# Altium PCB Node_V3.PcbDoc
Units mm, origin at the board's own origin, x right, y up, seen from the top; angles counter-clockwise.
Board outline 72.52 x 53.47 mm, 2 copper layers (Top Layer, Bottom Layer); 71 components, 51 nets, 277 pads, 61 vias.
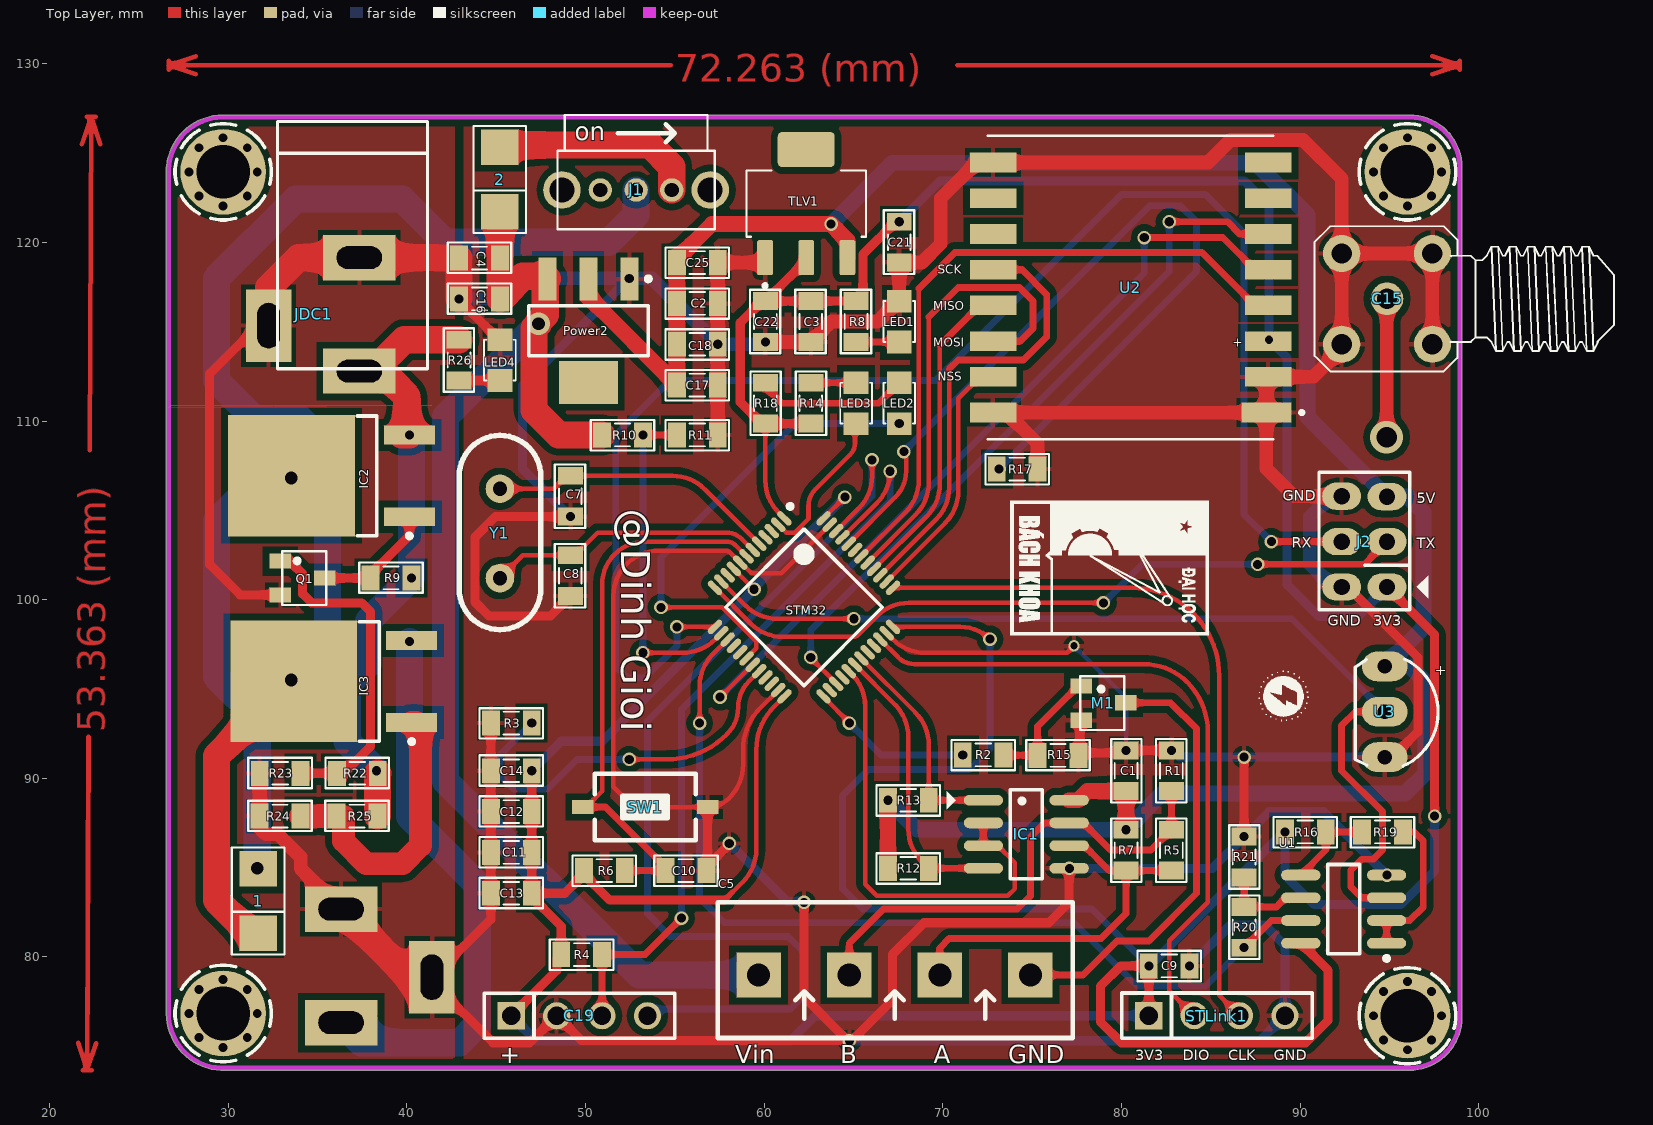
[diagram p0: Top Layer view]
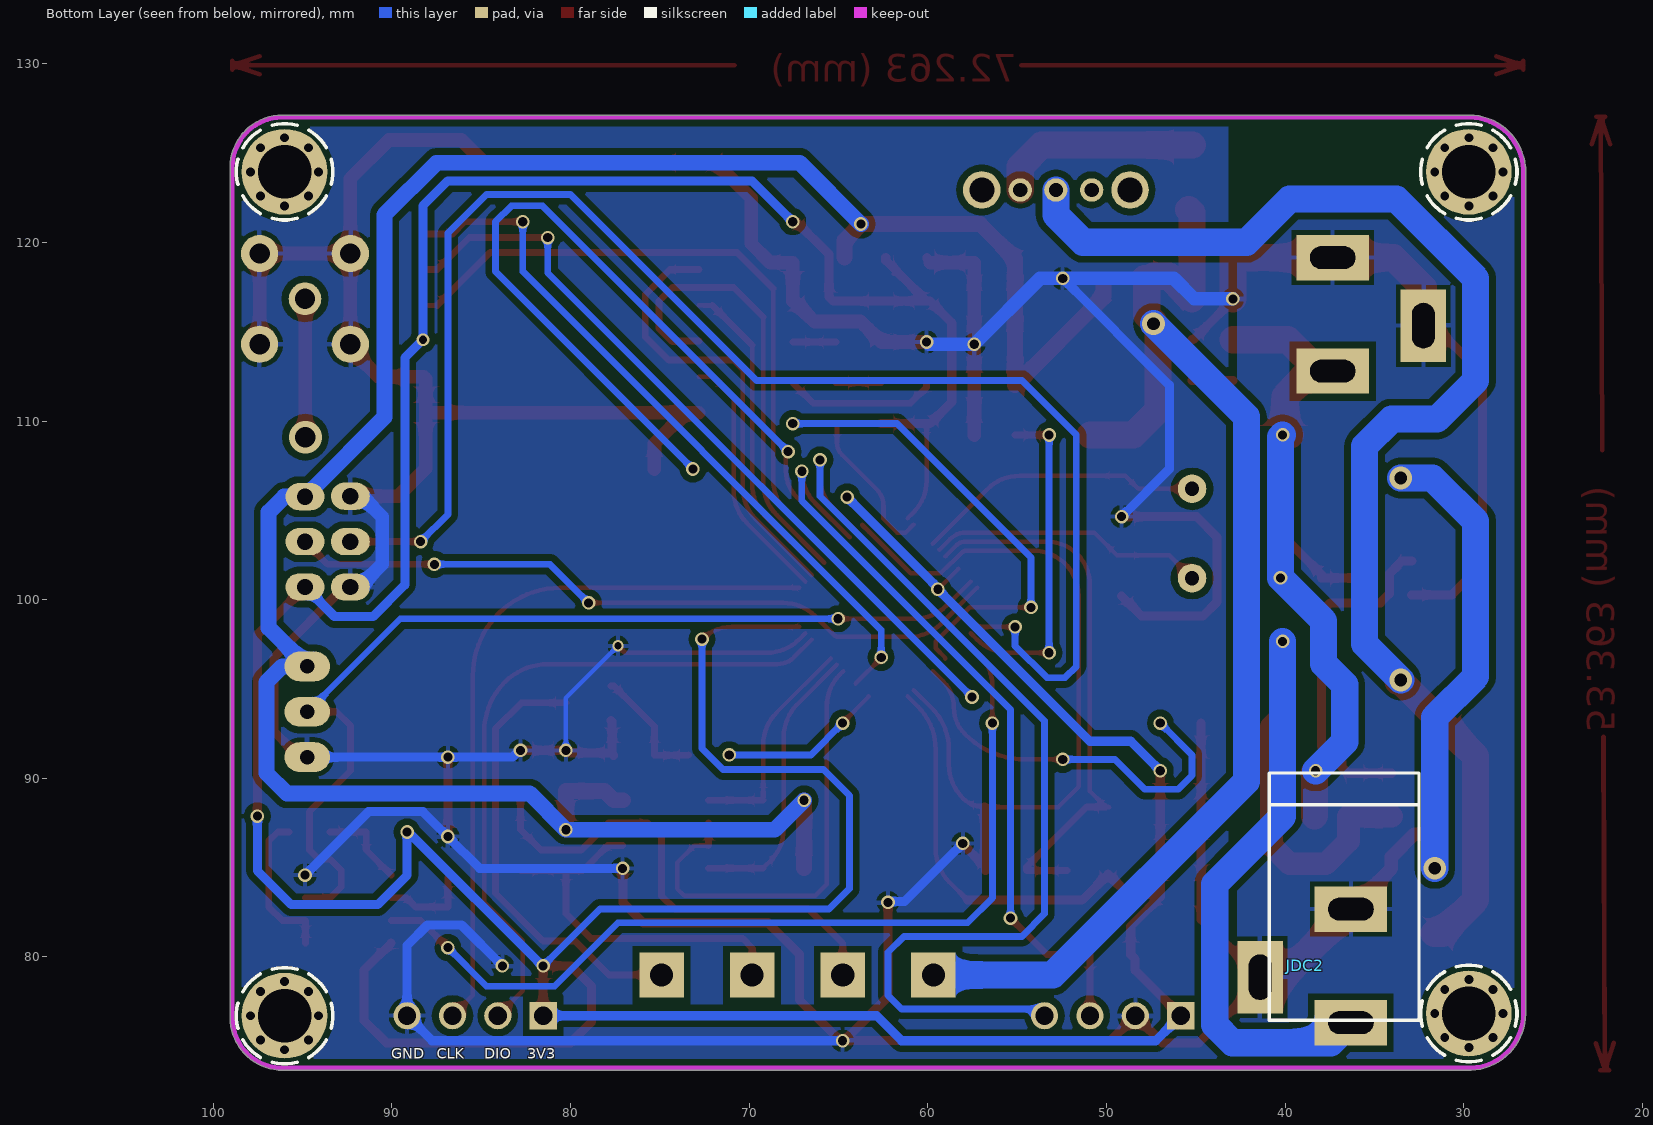
[diagram p1: Bottom Layer view, seen from below]

## Layer stack, top to bottom
Top Solder: solder mask 0.0102, Solder Resist, Dk 3.5
Top Layer: signal copper 0.0356
Dielectric 1: dielectric 0.32, FR-4, Dk 4.8
Bottom Layer: signal copper 0.0356
Bottom Solder: solder mask 0.0102, Solder Resist, Dk 3.5

## Board outline
29.601,73.661 cw(c29.705,76.822) 26.543,76.822 26.543,124.206 cw(c26.67,124.206) 26.557,124.265 cw(c29.705,123.965) 29.693,127.127 cw(c29.694,127) 29.699,127.127 cw(c29.705,127) 29.705,127.127 96.139,127.127 cw(c96.139,124.206) 99.06,124.207 cw(c98.933,124.206) 99.06,124.206 99.06,76.603 cw(c98.933,76.602) 99.06,76.602 cw(c96.118,76.602) 96.118,73.66 cw(c96.118,73.787) 96.118,73.66 29.738,73.661 cw(c29.718,73.787) 29.721,73.66 cw(c29.718,73.787) 29.697,73.661 29.605,73.661 cw(c29.605,73.789)

## Design rules (kind name [scope] priority, off if disabled: settings)
Clearance [All] p1: gap=0.381 ignorepadtopadclearanceinfootprint=TRUE except(0: Arc-Hole Track-Hole SMDPad-Hole THPad-Hole Via-Hole Fill-Hole Poly-Hole Region-Hole Text-Hole; 0.178: Arc-Arc Arc-Track Arc-SMDPad Track-Track Track-SMDPad SMDPad-SMDPad; 0.254: Arc-THPad Arc-Via Arc-Text Track-THPad Track-Via Track-Text SMDPad-THPad SMDPad-Via SMDPad-Text THPad-THPad THPad-Via THPad-Text Via-Via Via-Text Fill-Text Poly-Text Region-Text Text-Text)
PolygonConnect [All] p1: connectstyle=Relief reliefconductorwidth=0.254 reliefentries=4 polygonreliefangle="90 Angle" airgapwidth=0.254
RoutingVias [All] p1: holewidth=0.508 width=0.762 viastyle="Through Hole" minholewidth=0.508 minwidth=0.508 maxholewidth=0.711 maxwidth=1.27
SolderMaskExpansion [All] p1: expansion=0.102
Width [All] p1: maxlimit=1.524 minlimit=0.254 preferedwidth=0.508
30 further rules are at their usual default settings.

## Classes and differential pairs
component class STM32_V3: C1 C5 C7 C8 C9 C10 C11 C12 C13 C14 C15 C19 C21 IC1 J2 LED2 LED3 M1 R1 R2 R3 R4 R5 R6 R7 R10 R11 R12 R13 R14 R15 R16 R17 R18 R19 R20 R21 STLink1 STM32 STM32_V3 SW1 U1 U2 U3 Y1
component class Power_V3: 1 2 C2 C3 C4 C16 C17 C18 C22 C25 IC2 IC3 J1 JDC1 JDC2 LED1 LED4 Power2 Q1 R8 R9 R22 R23 R24 R25 R26 TLV1

## Components (designator, comment, footprint, x,y, rotation, side; value= is the part's Value field where it differs from the comment)
1 "S4" DIO-214AC(SMA) 31.623,83.058 r90 top
2 "S4" DIO-214AC(SMA) 45.148,123.444 r90 top
C1 "100nF" CAP_0805 80.264,90.424 r90 top value=33p
C2 "100nF" CAP_0805 56.261,116.586 r0 top value=33p
C3 "100nF" CAP_0805 62.611,115.57 r270 top value=33p
C4 "10uF" CAP_0805 44.069,119.126 r180 top value=33p
C5 "JP4" KF4-5.08 59.69,78.994 r0 top
C7 "22pF" CAP_0805 49.149,105.791 r270 top value=33p
C8 "22pF" CAP_0805 49.149,101.341 r270 top value=33p
C9 "100nF" CAP_0805 82.677,79.502 r0 top value=33p
C10 "100nF" CAP_0805 55.626,84.836 r0 top value=33p
C11 "100nF" CAP_0805 45.847,85.852 r180 top value=33p
C12 "100nF" CAP_0805 45.847,88.138 r180 top value=33p
C13 "100nF" CAP_0805 45.847,83.566 r180 top value=33p
C14 "100nF" CAP_0805 45.847,90.424 r180 top value=33p
C15 "210111003" SMA-RA 94.869,116.84 r90 top
C16 "100nF" CAP_0805 44.069,116.84 r180 top value=33p
C17 "10uF" CAP_0805 56.261,112.014 r0 top value=33p
C18 "100nF" CAP_0805 56.261,114.3 r0 top value=33p
C19 "JP4" JP4-C1T 45.847,76.708 r0 top
C21 "10uF" CAP_0805 67.564,120.015 r270 top value=33p
C22 "100nF" CAP_0805 60.071,115.57 r270 top value=33p
C25 "100nF" CAP_0805 56.261,118.872 r0 top value=33p
IC1 "MAX485" SO-8 74.676,86.868 r0 top
IC2 "AOD4185" TO-252 35.941,106.934 r180 top
IC3 "AOD4185" TO-252 36.068,95.421 r180 top
J1 "SK12D07VG4" SK12D07VG4 52.832,122.936 r180 top
J2 "Connector 3x2" JP3x2 93.599,103.251 r90 top
JDC1 "Adapter" DC-IN 34.798,115.974 r270 top value="Jac DC"
JDC2 "BATTERY" DC-IN 38.862,79.502 r270 bottom value="Jac DC"
LED1 "LED" LED-0805-Blue 67.564,114.427 r90 top value="LED 3 ly Single Colour"
LED2 "LED" LED-0805-Blue 67.564,112.141 r270 top value="LED 3 ly Single Colour"
LED3 "LED" LED-0805-Blue 65.151,112.141 r270 top value="LED 3 ly Single Colour"
LED4 "LED" LED-0805-Blue 45.211,112.268 r90 top value="LED 3 ly Single Colour"
M1 "SI2304/LN2302LT1G" SOT23A 78.994,94.234 r270 top
Power2 "AMS1117-5V" SOT223 50.165,115.062 r180 top
Q1 "2SC1815" SOT23D 34.163,101.207 r270 top value=C1815
R1 "680R" RES-SMD-0805 82.804,90.424 r270 top
R2 "1k" RES-SMD-0805 72.263,91.313 r0 top
R3 "10k" RES-SMD-0805 45.847,93.091 r0 top
R4 "10k" RES_SMD_0805 49.784,80.137 r0 top
R5 "120" RES-SMD-0805 82.804,85.979 r270 top
R6 "10k" RES_SMD_0805 51.054,84.836 r0 top
R7 "680R" RES-SMD-0805 80.264,85.979 r90 top
R8 "1k" RES-SMD-0805 65.151,115.57 r270 top
R9 "100k" RES-SMD-0805 39.116,101.219 r180 top
R10 "39k" RES-SMD-0805 52.07,109.22 r0 top
R11 "11k" RES-SMD-0805 56.261,109.22 r0 top
R12 "10k" RES-SMD-0805 68.072,84.963 r0 top
R13 "10k" RES-SMD-0805 68.072,88.773 r0 top
R14 "1k" RES-SMD-0805 62.611,110.998 r90 top
R15 "100k" RES-SMD-0805 76.454,91.288 r180 top
R16 "680R" RES-SMD-0805 90.297,86.995 r0 top
R17 "10k" RES-SMD-0805 74.168,107.315 r0 top
R18 "1k" RES-SMD-0805 60.071,110.998 r90 top
R19 "680R" RES-SMD-0805 94.615,86.995 r0 top
R20 "680R" RES-SMD-0805 86.868,81.661 r90 top
R21 "680R" RES-SMD-0805 86.868,85.598 r90 top
R22 "14k" RES-SMD-0805 37.224,90.282 r180 top
R23 "10k" RES-SMD-0805 32.906,90.282 r180 top
R24 "100k" RES-SMD-0805 32.893,87.884 r180 top
R25 "1k" RES-SMD-0805 37.211,87.884 r180 top
R26 "3k9" RES-SMD-0805 42.926,113.411 r270 top
STLink1 "JP4" JP4-C1T 81.534,76.71 r0 top
STM32 "STM32" "LQFP 48" 62.23,99.568 r315 top
SW1 "SW" SW-SMD 53.34,88.392 r180 top value="SW chip 2 pin"
TLV1 "LM1117- 5V" SOT230P700X180-4N 62.357,122.174 r90 top
U1 "LM358N/NOPB" SOIC8 94.843,80.772 r90 top
U2 "Ra-02 LoRa" Ra-02 80.518,117.475 r180 top
U3 "LM35" QTO-92 94.742,93.726 r270 top
Y1 "8MHz" XTAL 45.212,103.759 r90 top

## Footprints (in the part's own frame and the unit in brackets; to place one, negate y for a bottom-side part, rotate by r counter-clockwise, add the part's x,y. Pads: shape width x height; smd on the part's side, far side on the other; paste and mask are expansions set on the pad)
CAP_0805 [mil]
  rect 39.37x55 smd: 1(-45,0) 2(45,0)
  silkscreen extent -70,-34 70,33, body extent -40,-25 40,25, height 24
DC-IN [mil] "Jac DC input"
  rect 100x160 hole 50 slot 100 at 90 deg: 1(125,100) 2(-125,100)
  rect 160x100 hole 50 slot 100 at 0 deg: 3(25,-100)
  silkscreen extent -425,-80 120,250, body extent -410,-105 134,269, height 434
DIO-214AC(SMA) [mm] "DO-214AC Diode Smallest Size"
  rect 2x2.1 smd: 1(1.88,-0.051) 2(-1.732,-0.051)
  silkscreen extent -2.92,-1.52 3.07,1.42, body extent -2.5,-1.35 2.7,1.25, height 2.4
JP3x2 [mil] "Connector 3x2"
  oval 60x86 hole 36: 1(-100,-50) 2(0,-50) 3(99,-50) 4(-100,50) 5(0,50) 6(100,50)
  silkscreen extent -150,-141 153,100, body extent -150,-100 150,100, height 335
JP4-C1T [mm] "4 row, straight, gold plating"
  rect 1.52x1.52 hole 1.02: 1(0,0)
  round 1.52 hole 1.02: 2(2.54,0) 3(5.08,0) 4(7.62,0)
  silkscreen extent -1.52,-1.27 9.14,1.27, body extent -1.52,-1.25 9.14,1.25, height 8.51
KF4-5.08 [mm]
  rect 2.5x2.5 hole 1.3: 1(0,0) 2(5.08,0) 3(10.147,0) 4(15.215,0)
  silkscreen extent -2.29,-3.53 17.58,4.06, body extent -2.36,-3.43 17.64,4.07, height 10
LED-0805-Blue [mil]
  rect 50x55 smd: 1(0,0) 2(90,0)
  silkscreen extent 0,-35 90,35, body extent 5,-25 85,25, height 43
"LQFP 48" [mm] "LQFP, 48-Leads, Body 7,00x7,00mm, Pitch 0,50mm, IPC Medium Density"
  oval 1x0.35 smd: 1(-4.296,2.75) 2(-4.296,2.25) 3(-4.296,1.75) 4(-4.296,1.25) 5(-4.296,0.75) 6(-4.296,0.25) 7(-4.296,-0.25) 8(-4.296,-0.75) 9(-4.296,-1.25) 10(-4.296,-1.75) 11(-4.296,-2.25) 12(-4.296,-2.75) 25(4.296,-2.75) 26(4.296,-2.25) 27(4.296,-1.75) 28(4.296,-1.25) 29(4.296,-0.75) 30(4.296,-0.25) 31(4.296,0.25) 32(4.296,0.75) 33(4.296,1.25) 34(4.296,1.75) 35(4.296,2.25) 36(4.296,2.75)
  oval 0.35x1 smd: 13(-2.75,-4.296) 14(-2.25,-4.296) 15(-1.75,-4.296) 16(-1.25,-4.296) 17(-0.75,-4.296) 18(-0.25,-4.296) 19(0.25,-4.296) 20(0.75,-4.296) 21(1.25,-4.296) 22(1.75,-4.296) 23(2.25,-4.296) 24(2.75,-4.296) 37(2.75,4.296) 38(2.25,4.296) 39(1.75,4.296) 40(1.25,4.296) 41(0.75,4.296) 42(0.25,4.296) 43(-0.25,4.296) 44(-0.75,4.296) 45(-1.25,4.296) 46(-1.75,4.296) 47(-2.25,4.296) 48(-2.75,4.296)
  silkscreen extent -4.67,-3.1 3.1,3.57, body extent -4.5,-4.5 4.5,4.5, height 1.6
QTO-92 [mil] "TO-92"
  oval 66x100 hole 32: 1(-100,0) 2(0,0) 3(100,0)
  silkscreen extent -117,-65 120,118, body extent -109,-66 109,95, height 245
Ra-02 [mm]
  rect 2.8x1.1 smd: 1(-7.6,7)
  rect 2.6x1.1 smd: 2(-7.7,5) 3(-7.7,3) 4(-7.7,1) 5(-7.7,-1) 6(-7.7,-3) 7(-7.7,-5) 8(-7.7,-7) 9(7.7,-7) 10(7.7,-5) 11(7.7,-3) 12(7.7,-1) 13(7.7,1) 14(7.7,3) 15(7.7,5) 16(7.7,7)
  silkscreen extent -9.68,-8.5 8,8.5, body extent -8,-8.49 8,8.51, height 3.03
RES-SMD-0805 [mil]
  rect 39.37x55 smd: 1(-45,0) 2(45,0)
  silkscreen extent -70,-34 70,33, body extent -39,-25 39,25, height 31
RES_SMD_0805 [mil]
  rect 39.37x55 smd: 1(-45,0) 2(45,0)
  silkscreen extent -70,-34 70,33, body extent -39,-25 39,25, height 31
SK12D07VG4 [mm]
  round 1.308 hole 0.8: 1(-2,0) 2(2,0) COM(0,0)
  round 2.1 hole 1.4: M1(-4.15,0) M2(4.15,0)
  silkscreen extent -4.4,-4.2 4.4,2.2
SMA-RA [mil]
  round 72 hole 45: 1(0,0)
  round 82 hole 45: 2(-100,-100) 3(100,-100) 4(100,100) 5(-100,100)
  silkscreen extent -160,-500 160,160, body extent -136,-457 139,137, height 394
SO-8 [mm] "8-Pin Small Outline Integrated Circuit 1.27 mm Pitch, IPC Medium Density"
  oval 2.2x0.6 smd: 1(-2.4,1.905) 2(-2.4,0.635) 3(-2.4,-0.635) 4(-2.4,-1.905) 5(2.4,-1.905) 6(2.4,-0.635) 7(2.4,0.635) 8(2.4,1.905)
  silkscreen extent -4.44,-2.5 0.9,2.5, body extent -2.89,-2.43 3.15,2.59, height 1.6
SOIC8 [mm] "SOIC, 8-Leads, Body 4.9x3.9mm, Pitch 1.27mm, IPC Medium Density"
  oval 0.6x2.2 smd: 1(0,0) 2(1.27,0) 3(2.54,0) 4(3.81,0) 5(3.81,4.8) 6(2.54,4.8) 7(1.27,4.8) 8(0,4.8)
  silkscreen extent -0.97,-0.13 4.41,3.3, body extent -0.55,0.45 4.36,4.35, height 1.75
SOT23A [mm] "SOT 23A"
  rect 0.85x1.2 smd: 1(-0.94,-1.245) 2(0.005,1.25) 3(0.985,-1.25)
  silkscreen extent -1.47,-1.3 1.52,1.17, body extent -1.5,-1.3 1.5,1.2, height 1.06
SOT23D [mm] "SOT 23C - 1-3-2 - BCE"
  rect 0.85x1.2 smd: 1(-0.95,-1.25) 2(0.94,-1.245) 3(0,1.25)
  silkscreen extent -1.5,-1.14 1.5,1.32, body extent -1.5,-1.17 1.5,1.33, height 1.06
SOT223 [mm]
  rect 1x2.4 smd: 1(-2.3,-2.9) 2(0,-2.9) 3(2.3,-2.9)
  rect 3.3x2.4 smd: 4(0,2.9)
  silkscreen extent -3.48,-3.02 3.35,1.4, body extent -3.25,-3.56 3.25,3.4, height 1.68
SOT230P700X180-4N [mm]
  rrect25% 1.97x0.89 smd: 1(-3.025,2.3) 2(-3.025,0) 3(-3.025,-2.3)
  rrect25% 1.97x3.19 smd: 4(3.025,0)
  silkscreen extent -4.7,-3.35 1.85,3.35
SW-SMD [mm] "Switch SMD type"
  rect 1.2x0.8 smd: 1(-3.5,0) 2(3.5,0)
  silkscreen extent -2.82,-1.85 2.82,1.85, body extent -3.05,-1.85 3.05,1.85, height 2.5
TO-252 [mm] "KVU D-PAK, 3-Pads, Body 6,2x6,7mm (max), IPC Medium Density"
  rect 2.85x1.05 smd: 1(-4.2,2.29) 3(-4.2,-2.29)
  rect 7.1x6.8 smd: 2(2.4,0)
  silkscreen extent -4.33,-3.35 -1.27,3.49, body extent -5.03,-3.35 5.08,3.35, height 2.4
XTAL [mm]
  round 1.6 hole 0.8: 1(-2.552,0.001) 2(2.448,0.001)
  silkscreen extent -5.44,-2.29 5.44,2.29, body extent -5.55,-2.32 5.62,2.35, height 3.63

## Part data
1 2: library part "Diode S4", "D醤", Chung_Loai=D醤, Don_Vi=Con, Ma_Hang=MH005519, Ten_Linh_Kien="Diode S4 SOD123 ( 1N5819 SOD123)"
C1 C2 C3 C4 C7 C8 C9 C10 C11 C12 C13 C14 C16 C17 C18 C21 C22 C25: library part CapSMD, "Capacitor", LatestRevisionDate=17-Jul-2002, LatestRevisionNote="Re-released for DXP Platform.", PackageReference=RAD-0.3, Published=8-Jun-2000, Publisher="Altium Limited"
C5 C19 STLink1: "WR-PHD 2.54 mm Angled Socket Header", Manufacturer="Würth Elektronik eiSos GmbH", partNo=613004143121, ComponentLink1 Description=Manufacturer, ComponentLink1URL=http://www.we-online.com, ComponentLink2 Description=Datasheet, ComponentLink2URL=http://katalog.we-online.de/em/datasheet/6130xx143121.pdf, Created by="Karrer Zheng", Created Date="29 March 2013", NoPins=04
C15: library part "CON Ant", "CONNECTOR ANTEN", Manufacturer="Würth Elektronik eiSos GmbH", ComponentLink1Description=Manufacturer, ComponentLink1URL=http://www.we-online.de, ComponentLink2Description=Datasheet, ComponentLink2URL=http://katalog.we-online.de/kataloge/eisos/index.php?language=en&pf=Filter_gerade, Created by="Christin Zierenner", Created Date="May 2012", partNo=210111003
IC1: "RS232 - RS485 (Same sn75176)"
IC2 IC3: library part MOSFET_P, "Generic P Channel MOSFET"
J1: "Switch Slide ON ON SPDT Side Slide 0.3A 30VDC PC Pins Bracket Mount/Through Hole Bulk", Package=None, Availability="Not in stock", Check_prices=https://www.snapeda.com/parts/SK12D07VG4/C&K/view-part/6618061/?ref=eda, MF=C&K, MP=SK12D07VG4, Price=None, SnapEDA_Link=https://www.snapeda.com/parts/SK12D07VG4/C&K/view-part/6618061/?ref=snap
J2: library part JP3x2
JDC1 JDC2: library part DCIN, "Jac DC input"
LED1 LED2 LED3 LED4: "LED Single colour Green and Red"
M1: library part MOSFET_N, "Generic N Channel MOSFET"
Power2: library part LM1117, "800mA Low-Dropout Linear Regulator", Creator="Nguyen Ba Bien", Website=http://group3i.net
Q1: library part C1815, "NPN 600mW, ECB", =C2383
R1 R2 R3 R5 R7 R8 R9 R10 R11 R12 R13 R14 R15 R16 R17 R18 R19 R20 R21 R22 R23 R24 R25 R26: library part "Resistor - SMD", "Resistor", Manufacturer="Generic Components", Class=Passive, Published=08/06/2000, Publisher="Altium Hobart Technology Centre"
R4 R6: library part "Resistor - SMD", "Resistor SMD", Manufacturer="Generic Components", Class=Passive, Published=08/06/2000, Publisher="Altium Hobart Technology Centre"
STM32: library part STM32F103C8T6, "STM32 ARM-based 32-bit MCU with 64 Kbytes Flash, 64-pin LQFP, Industrial Temperature"
SW1: library part SW2, "Switch button 2 pin"
TLV1: library part LM1117
U1: "General Purpose Amplifier 2 Circuit - 8-PDIP", Package="PDIP-8 ON Semiconductor", Check_prices=https://www.snapeda.com/parts/LM358N/Onsemi/view-part/?ref=eda, MF="ON Semiconductor", MP=LM358N, SnapEDA_Link=https://www.snapeda.com/parts/LM358N/Onsemi/view-part/?ref=snap
U2: "LoRa Module Ra-02"
U3: "Teminal"
Y1: library part XTAL, "Crystal Oscillator", LatestRevisionDate=17-Jul-2002, LatestRevisionNote="Re-released for DXP Platform.", PackageReference=R38, Published=8-Jun-2000, Publisher="Altium Limited"

## Free pads (board coordinates)
  round 4.8 hole 3: 16(29.718,76.835) 16(29.718,123.952) 16(96.012,76.71) 16(96.012,123.952)
  round 0.5 hole 0.5: 17(31.623,76.835) 17(31.623,123.952) 17(97.917,76.71) 17(97.917,123.952) 18(31.065,78.182) 18(31.065,125.299) 18(97.359,78.057) 18(97.359,125.299) 19(29.718,78.74) 19(29.718,125.857) 19(96.012,78.615) 19(96.012,125.857) 20(28.371,78.182) 20(28.371,125.299) 20(94.665,78.057) 20(94.665,125.299) 21(27.813,76.835) 21(27.813,123.952) 21(94.107,76.71) 21(94.107,123.952) 22(28.371,75.488) 22(28.371,122.605) 22(94.665,75.363) 22(94.665,122.605) 23(29.718,74.93) 23(29.718,122.047) 23(96.012,74.805) 23(96.012,122.047) 24(31.065,75.488) 24(31.065,122.605) 24(97.359,75.363) 24(97.359,122.605)

## Via types
v1: diameter 0.762, hole 0.508, Top Layer to Bottom Layer, 54 vias
v2: diameter 1.27, hole 0.711, Top Layer to Bottom Layer, 4 vias
v3: diameter 1.829, hole 1.143, Top Layer to Bottom Layer, 1 vias
v4: diameter 0.635, hole 0.406, Top Layer to Bottom Layer, 1 vias
v5: diameter 0.711, hole 0.457, Top Layer to Bottom Layer, 1 vias

## Nets (pads, with @x,y where several pads share a name; then routed paths per layer and width w, separated by ;. In a path a pad name is that pad's centre, name@x,y a point inside that pad or via, vN(x,y) a via of type N, cw(c..) or ccw(c..) an arc to the next point about the centre after c; other vN are vias at no path point)
3V3: C3.1 C9.1 C11.1 C12.1 C13.1 C14.1 C19.1 C21.1 C22.1 J2.1 R4.1 R6.1 R8.1 R14.1 R16.1 R18.1 STLink1.1 STM32.1 STM32.9 STM32.24 STM32.36 STM32.48 TLV1.2 U1.8 U2.3 | length 297.3
  Top Layer w0.254: 57.785,83.185 58.819,84.219 ccw(c57.023,86.015) 59.563,86.015 59.563,91.618 cw(c62.929,91.618) 60.549,93.998 STM32.24 ; STM32.9 58.308,101.717 59.436,100.589 v1(59.436,100.584) ; R18.1 60.071,106.668 ccw(c62.611,106.668) 60.815,104.872 STM32.1 ; STM32.48 v1(64.516,105.743) ; STM32.36 70.991,98.475 cw(c70.991,96.137) v1(72.644,97.79)
  Top Layer w0.508: C19.1 48.395,79.256 48.395,79.891 R4.1 48.641,81.717 46.99,83.368 C13.1 ; v1(46.99,90.424) C12.1 C11.1 C13.1 ; 57.785,83.185 51.364,83.185 49.911,84.638 48.84,83.566 C13.1 ; TLV1.2 62.357,118.999 C22.1 ; R14.1 R18.1 59.873,109.855 58.662,111.066 58.662,115.502 59.873,116.713 C22.1 ; v1(67.564,121.158) 67.366,121.158 65.534,119.326 65.534,116.959 65.288,116.713 R8.1 C3.1 C22.1 ; STLink1.1@81.661,76.71 81.534,76.837 v1(81.534,79.502) 79.976,79.502 78.822,78.348 78.822,76.372 80.01,75.184 90.297,75.184 91.567,76.454 91.567,79.248 U1.8 ; J2.1 94.924,100.711 95.394,100.242 95.394,100.186 97.536,98.044 v1(97.536,87.884)
  Bottom Layer w0.381: v1(72.644,97.79) 72.644,91.67 71.462,90.487 65.849,90.487 64.389,89.027 64.389,83.82 65.532,82.677 78.359,82.677 v1(81.534,79.502)
  Bottom Layer w0.508: C19.1 47.244,75.311 61.468,75.311 62.867,76.71 STLink1.1 ; v1(46.99,90.424) 48.641,92.075 50.927,92.075 v1(59.436,100.584) 59.436,100.663 v1(64.516,105.743) ; v1(67.564,121.158) 69.85,123.444 86.868,123.444 88.265,122.047 v5(88.265,114.554) 89.281,113.538 89.281,100.838 91.059,99.06 93.218,99.06 J2.1 ; v1(81.534,79.502) 81.597,79.502 89.09,86.995 v1(89.154,86.995) 89.154,84.582 90.805,82.931 95.631,82.931 97.536,84.836 v1(97.536,87.884)
5V: C1.1 C2.1 C17.1 C18.1 C25.1 IC1.8 J2.3 Power2.2 R7.2 R12.1 R13.1 TLV1.3 U3.1 | length 133.6
  Top Layer w0.889: Power2.2@50.165,117.637 50.165,116.967 C17.1 ; C17.1@55.118,112.212 C18.1 C2.1 C25.1 55.118,119.07 57.078,121.031 v1(63.749,121.031) 64.657,120.123 TLV1.3 ; R12.1 v1(66.929,88.773) ; IC1.8 77.587,88.773 78.095,89.281 C1.1 v1(80.264,87.122)
  Bottom Layer w0.889: v1(63.749,121.031) 67.178,124.46 87.503,124.46 90.424,121.539 90.424,110.211 J2.3@94.417,106.217 ; v1(66.929,88.773) 68.58,87.122 v1(80.264,87.122) 82.296,89.154 95.885,89.154 97.028,90.297 97.028,95.377 96.139,96.266 U3.1 96.901,98.425 96.901,104.902 96.037,105.766 J2.3
11.1V: 2.2 C4.1 C5.1 C16.1 Power2.3 R10.1 | length 70.1
  Top Layer w1.524: 2.2@45.39,121.839 45.212,121.661 C4.1 C16.1 46.482,118.11 47.392,118.11 Power2.3@47.646,117.856 ; Power2.3 47.759,117.856 Power2.3@47.646,117.856 ; R10.1 48.5,109.22 47.117,110.603 47.117,115.189 v2(47.371,115.443) 47.371,115.57 47.752,115.951 47.752,117.75 Power2.3@47.646,117.856
  Bottom Layer w1.524: v2(47.371,115.443) 42.164,110.236 42.164,89.838 53.008,78.994 C5.1
Adapter: IC2.3 JDC1.1 R9.1 R22.1 R25.1 R26.1 | length 34.9
  Top Layer w1.524: JDC1.1 JDC1.1@38.1,112.799 ; R25.1 38.354,90.269 R22.1 ; v1(40.141,109.224) 39.715,109.224 40.005,109.514 40.005,111.379 39.093,112.291 38.608,112.291 JDC1.1@38.1,112.799 ; R26.1 41.275,114.554 39.855,114.554 JDC1.1@38.1,112.799
  Bottom Layer w1.524: v1(38.291,90.424) 36.668,92.047 36.668,95.233 37.846,96.412 37.846,98.806 v1(40.259,101.219) 40.259,109.106 v1(40.141,109.224)
CLK: STLink1.3 STM32.37 | length 40.6
  Top Layer w0.254: STM32.37 80.596,100.661 cw(c80.596,95.824) 84.017,99.244 cw(c80.505,95.733) 85.471,95.733 85.471,77.853 STLink1.3
DE/RE: IC1.2 IC1.3 STM32.29 | length 25.9
  Top Layer w0.254: STM32.29 64.915,95.822 cw(c63.119,94.026) 65.659,94.026 65.659,84.074 66.308,83.425 73.646,83.425 74.041,83.82 74.041,85.268 73.076,86.233 IC1.3
  Top Layer w0.381: IC1.3 IC1.2
DIO: STLink1.2 STM32.34 | length 38.4
  Top Layer w0.254: STM32.34 67.501,96.771 ccw(c68.415,97.685) 68.415,96.393 81.253,96.393 cw(c81.253,92.956) 83.684,95.386 cw(c80.902,92.604) 84.836,92.604 84.836,83.058 82.677,80.899 82.677,78.107 STLink1.2
feedback: R10.2 R11.1 STM32.14 | length 18.8
  Top Layer w0.254: v1(53.213,97.028) 55.456,97.028 ccw(c55.456,99.568) 57.252,97.772 STM32.14
  Top Layer w0.381: v1(53.213,109.22) R11.1
  Bottom Layer w0.381: v1(53.213,97.028) v1(53.213,109.22)
GND: C1.2 C2.2 C3.2 C4.2 C7.2 C8.2 C9.2 C10.2 C11.2 C12.2 C13.2 C14.2 C15.2 C15.3 C15.4 C15.5 C16.2 C17.2 C18.2 C19.2 C21.2 C22.2 C25.2 IC1.5 J2.4 J2.6 JDC1.2 JDC1.3 JDC2.2 JDC2.3 LED1.2 LED4.2 M1.3 Power2.1 Q1.2 R1.1 R3.1 R11.2 R15.1 R17.2 R21.2 R23.2 R24.2 STLink1.4 STM32.8 STM32.23 STM32.35 STM32.47 SW1.1 TLV1.1 U1.4 U2.1 U2.2 U2.9 U2.16 U3.3 | length 453
  Top Layer w0.254: STM32.23 59.781,93.937 ccw(c62.104,91.615) 58.819,91.615 58.819,90.758 cw(c56.179,90.758) 58.046,88.891 cw(c56.84,90.097) SW1.1 52.705,88.392 51.562,89.535 51.562,100.203 cw(c54.102,100.203) 54.102,102.743 57.866,102.743 cw(c57.866,102.433) 58.085,102.653 STM32.8 58.688,102.075 59.29,101.473 60.953,101.473 STM32.47 63.677,104.171 63.321,103.815 ; STM32.35 67.208,97.772 ccw(c69.004,99.568) 69.004,97.028 76.957,97.028 v4(77.343,97.414)
  Top Layer w0.508: R24.2@31.75,87.249 R24.2@31.75,87.503 ; JDC1.3 31.646,115.339 28.956,112.649 28.956,101.981 30.67,100.267 Q1.2 ; JDC2.2@35.941,83.058 35.56,82.677 JDC2.2 ; JDC2.3@41.402,78.613 44.829,75.186 46.865,75.186 C19.2 49.782,75.313 v1@64.691,75.313 ; JDC2.3@41.815,79.216 44.704,82.105 C13.2 C11.2 C12.2 C14.2 R3.1 ; C16.2@43.306,116.395 45.148,114.554 LED4.2 ; C8.2 48.045,99.094 44.593,99.094 43.815,99.872 43.815,103.505 44.958,104.648 v1(49.149,104.648) ; C10.2 56.769,85.034 C10.2@56.84,85.106 ; SW1.1 C10.2@56.84,85.106 ; v1(58.046,86.36) 58.046,86.311 C10.2@56.84,85.106 ; TLV1.1@59.866,118.872 60.057,119.063 TLV1.1 ; v1(62.23,83.058) 62.23,77.774 v1@64.691,75.313 ; v1@64.77,75.313 v1@64.691,75.313 ; IC1.5 77.076,83.058 75.933,81.915 68.961,81.915 67.183,80.137 67.183,77.585 64.801,75.203 v1@64.691,75.313 ; R15.1 R15.1@77.671,91.361 ; M1.3 77.671,93.175 R15.1@77.671,91.361 ; v1(82.804,91.567) v1(80.264,91.567) 80.124,91.427 77.737,91.427 R15.1@77.671,91.361 ; v1(86.868,86.741) v1(86.868,91.186) ; J2.4 92.659,100.711 96.596,96.774 96.596,92.608 95.174,91.186 U3.3
  Top Layer w0.762: R24.2@31.75,87.249 32.131,86.868 32.779,86.868 34.049,85.598 34.049,84.95 JDC2.2@35.941,83.058 ; R24.2@31.763,87.897 R23.2 ; R11.2 C17.2 v1(57.404,114.3) C2.2 C25.2 TLV1.1@59.866,118.872 ; v1(60.071,114.427) C3.2 63.754,115.57 66.358,115.57 67.501,116.713 LED1.2 C21.2 68.834,118.872 69.89,119.928 69.89,122.468 71.897,124.475 U2.9 84.851,124.475 86.106,125.73 90.17,125.73 92.329,123.571 C15.4 ; U2.16 U2.16@73.568,110.475 ; R17.2 75.311,108.732 U2.16@73.568,110.475 ; J2.6 89.662,105.791 88.118,107.335 U2.1 ; C15.2 C15.3 C15.4 ; U2.16@73.568,110.475 U2.1 ; U2.1 88.118,112.375 U2.2 90.758,112.475 92.062,113.779 92.062,114.033 C15.5 C15.4
  Top Layer w1.524: JDC1.3 32.258,117.475 33.932,119.149 JDC1.2 41.656,119.149 41.679,119.126 C4.2 v1(42.926,116.84) ; JDC2.2 40.386,78.613 41.402,79.629 JDC2.3 JDC2.3@41.402,78.613
  Bottom Layer w0.254: v4(77.343,97.414) 80.264,94.493 v1(80.264,91.567)
  Bottom Layer w0.508: v1(49.149,104.648) 46.482,107.315 46.482,112.014 v1(52.451,117.983) ; v1(58.046,86.36) 61.299,83.107 62.181,83.107 v1(62.23,83.058) ; v1(64.77,75.311) 87.755,75.311 STLink1.4 89.154,80.645 88.011,81.788 86.106,81.788 v1(83.82,79.502) ; v1(77.089,84.963) 85.09,84.963 v1(86.868,86.741) 88.265,88.138 91.313,88.138 v1(94.869,84.582) ; v1(82.804,91.567) 82.873,91.567 83.254,91.186 v1(86.868,91.186) U3.3
  Bottom Layer w0.762: v1(42.926,116.84) 45.085,116.84 46.228,117.983 v1(52.451,117.983) 53.721,117.983 v1(57.404,114.3) 59.944,114.3 v1(60.071,114.427) ; J2.4 91.821,100.711 90.551,101.981 90.551,104.648 91.694,105.791 J2.6
LED0: LED3.2 STM32.2 | length 8.6
  Top Layer w0.254: STM32.2 60.809,104.197 61.247,103.759 61.722,103.759 62.484,104.521 62.484,105.252 cw(c63.785,105.252) 62.865,106.172 64.818,108.125 ccw(c64.168,108.775) 65.087,108.775 65.087,109.855 LED3.2
LED1: LED2.2 STM32.18 | length 26.5
  Top Layer w0.254: v1(54.229,99.568) 57.658,99.568 59.563,97.663 59.563,97.281 59.015,96.733 STM32.18
  Bottom Layer w0.381: v1(54.229,99.568) 54.229,102.362 61.722,109.855 v1(67.564,109.855)
Lm35: R20.1 STM32.15 U1.7 | length 52.2
  Top Layer w0.254: v1(56.388,93.091) 56.388,95.149 cw(c58.928,95.149) 57.132,96.945 STM32.15
  Top Layer w0.381: v1(86.868,80.518) 88.392,82.042 U1.7
  Bottom Layer w0.381: v1(56.388,93.091) 56.388,83.312 57.785,81.915 77.343,81.915 80.899,78.359 84.709,78.359 v1(86.868,80.518)
Lm35_adc: STM32.11 U1.3 U3.2 | length 56.1
  Top Layer w0.254: STM32.11 58.939,99.677 ccw(c60.735,101.473) 60.735,98.933 v1(65.024,98.933)
  Top Layer w0.381: U3.2 93.1,93.726 92.329,92.955 92.329,90.424 94.615,88.138 94.615,85.979 94.107,85.471 93.472,85.471 92.837,84.836 92.837,83.947 93.472,83.312 U1.3
  Bottom Layer w0.381: v1(65.024,98.933) 89.535,98.933 U3.2
Lora_DIO0: STM32.19 U2.5 | length 45.9
  Top Layer w0.254: v1(57.531,94.551) 57.549,94.551 59.351,96.353 STM32.19 ; U2.5 88.234,118.491 U2.5@88.265,118.491
  Top Layer w0.381: v1(81.28,120.269) 85.674,120.269 87.468,118.475 U2.5
  Bottom Layer w0.381: v1(57.531,94.551) 81.28,118.3 v1(81.28,120.269)
Lora_DIO1: STM32.27 U2.6 | length 40.6
  Top Layer w0.254: v1(62.611,96.771) 62.611,96.738 64.03,95.319 STM32.27
  Top Layer w0.381: v1(82.677,121.158) 85.928,121.158 86.611,120.475 U2.6
  Bottom Layer w0.381: v1(62.611,96.771) 62.611,98.298 82.677,118.364 v1(82.677,121.158)
MISO: STM32.40 U2.13 | length 17.8
  Top Layer w0.254: STM32.40 69.093,104.664 ccw(c67.297,106.46) 69.837,106.46 69.837,114.244 ; U2.13@72.068,116.475 U2.13
  Top Layer w0.381: 69.837,114.244 U2.13@72.068,116.475
MOSI: STM32.41 U2.14 | length 26
  Top Layer w0.254: STM32.41 68.471,104.748 ccw(c66.675,106.544) 69.215,106.544 69.215,115.824
  Top Layer w0.381: 69.215,115.824 70.866,117.475 74.295,117.475 75.057,116.713 75.057,115.189 74.343,114.475 U2.14
Net1_1: 1.1 IC2.2 | length 25.6
  Top Layer w0.508: v2(31.623,84.963) 31.648,84.938 1.1
  Bottom Layer w1.524: v2(31.623,84.963) 31.623,93.409 29.337,95.695 29.337,104.394 31.75,106.807 v2(33.528,106.807)
Net2_1: 2.1 J1.1 | length 11.4
  Top Layer w1.524: 2.1@45.199,125.451 53.619,125.451 54.832,124.238 J1.1
NetC5_2: C5.2 IC1.7 R1.2 R5.1 | length 27.8
  Top Layer w0.381: C5.2 64.77,80.772 66.675,82.677 74.168,82.677 74.905,83.414 74.905,86.716 75.692,87.503 IC1.7 77.876,87.503 79.4,85.979 81.661,85.979 R5.1 R1.2
NetC5_3: C5.3 IC1.6 R5.2 R7.1 | length 21.3
  Top Layer w0.381: C5.3 69.837,80.505 70.358,81.026 78.867,81.026 80.264,82.423 R7.1 R5.2 ; IC1.6 77.92,86.233 79.317,84.836 R7.1@80.066,84.836
NetC5_4: C5.4 M1.2 | length 25
  Top Layer w0.381: C5.4 77.851,78.994 79.756,80.899 81.534,80.899 84.201,83.566 84.201,92.783 82.756,94.229 M1.2
NetIC2_1: IC2.1 Q1.3 R9.2 | length 6.9
  Top Layer w0.508: Q1.3 35.419,101.213 37.967,101.213 R9.2 37.973,101.417 40.141,103.585 IC2.1
NetIC3_1: IC3.1 R24.1 R25.2 | length 16.3
  Top Layer w1.27: R24.1 R25.2 36.449,87.884 36.449,86.487 37.719,85.217 39.751,85.217 40.767,86.233 40.767,92.894 40.53,93.131 IC3.1
NetIC3_3: IC3.3 JDC2.1 | length 31.5
  Bottom Layer w1.524: JDC2.1 37.446,75.203 42.945,75.203 43.942,76.2 43.942,84.074 40.141,87.875 v1(40.141,97.663)
NetLED1_1: LED1.1 R8.2 | length 2.4
  Top Layer w0.381: R8.2 LED1.1
NetLED2_1: LED2.1 R18.2 | length 8.6
  Top Layer w0.381: R18.2 60.071,111.887 60.96,110.998 66.421,110.998 LED2.1
NetLED3_1: LED3.1 R14.2 | length 2.5
  Top Layer w0.381: R14.2 LED3.1
NetLED4_1: LED4.1 R26.2 | length 2.3
  Top Layer w0.508: R26.2 LED4.1
NetM1_1: M1.1 R2.2 R15.2 | length 6.9
  Top Layer w0.381: R2.2 73.431,91.288 R15.2 75.311,92.91 77.574,95.174 M1.1
NetQ1_1: Q1.1 R22.2 R23.1 | length 19
  Top Layer w0.508: Q1.1 33.469,102.157 34.163,101.463 34.163,100.325 34.666,99.822 37.465,99.822 37.973,99.314 37.973,91.793 36.462,90.282 R22.2 R23.1
NetR3_2: R3.2 STM32.20 | length 21.9
  Top Layer w0.254: v1(52.451,91.059) 54.531,91.059 ccw(c54.531,95.848) 57.918,92.462 ccw(c56.401,93.98) 58.547,93.98 cw(c60.585,93.98) 59.144,95.421 STM32.20
  Bottom Layer w0.381: v1(46.99,93.091) 45.212,91.313 45.212,90.17 45.996,89.386 47.857,89.386 49.53,91.059 v1(52.451,91.059)
NetR16_2: R16.2 R19.1 U1.5 | length 5
  Top Layer w0.381: U1.5 91.44,85.979 R16.2 R19.1
NetR17_1: R17.1 STM32.44 | length 47.3
  Top Layer w0.254: STM32.44 67.348,105.747 ccw(c65.907,107.188) 67.945,107.188 67.945,107.981 ccw(c67.511,107.981) v1(67.818,108.287)
  Bottom Layer w0.381: v1(67.818,108.287) 81.578,122.047 83.312,122.047 84.201,121.158 84.201,118.364 v1(73.152,107.315)
NetR19_2: R19.2 U1.1 U1.2 | length 8.7
  Top Layer w0.381: U1.1 U1.2 96.139,82.042 96.901,82.804 96.901,86.487 96.393,86.995 R19.2
NetR20_2: R20.2 R21.1 U1.6 | length 5
  Top Layer w0.381: R21.1 R20.2 88.676,82.804 89.184,83.312 U1.6
NSS: STM32.38 U2.15 | length 14.3
  Top Layer w0.254: STM32.38 70.122,104.278 ccw(c68.326,106.074) 70.866,106.074 70.866,111.273 72.068,112.475 U2.15
OSC_IN: C7.1 STM32.5 Y1.2 | length 16.3
  Top Layer w0.254: Y1.2 48.224,106.207 48.951,106.934 C7.1 54.873,106.934 cw(c54.873,104.394) 56.669,106.19 STM32.5
OSC_OUT: C8.1 STM32.6 Y1.1 | length 15.6
  Top Layer w0.254: Y1.1 46.488,102.484 C8.1 49.413,102.484 50.688,103.759 57.866,103.759 cw(c57.866,102.489) 58.765,103.387 STM32.6
Power_sen: R2.1 STM32.25 | length 9.2
  Top Layer w0.254: STM32.25 63.323,94.562 64.77,93.115 v1(64.77,93.091)
  Bottom Layer w0.381: v1(64.77,93.091) 66.548,91.313 v1(71.12,91.313)
Reset: C10.1 R6.2 STM32.7 SW1.2 | length 31.1
  Top Layer w0.254: SW1.2 50.04,88.392 50.927,89.279 50.927,100.838 cw(c53.34,100.838) 53.34,103.251 57.923,103.251 cw(c57.923,102.598) 58.385,103.06 STM32.7 STM32.7@58.99,102.429
  Top Layer w0.381: SW1.2@50.04,88.392 51.125,88.392 54.483,85.034 C10.1 R6.2
RS485_RX: IC1.1 R13.2 STM32.31 | length 12.4
  Top Layer w0.254: STM32.31 68.471,93.681 cw(c66.675,91.884) 69.215,91.884 R13.2
  Top Layer w0.381: R13.2 IC1.1
RS485_TX: IC1.4 R12.2 STM32.30 | length 15.9
  Top Layer w0.254: STM32.30 67.328,94.116 cw(c65.532,92.32) 68.072,92.32 68.072,87.158 ccw(c70.612,87.158) 69.045,85.159 69.215,84.989 R12.2
  Top Layer w0.381: R12.2 IC1.4
Rst_lora: STM32.42 U2.4 | length 37.8
  Top Layer w0.254: STM32.42 67.916,104.901 ccw(c66.12,106.697) 68.66,106.697 68.66,117.428 ; U2.4@87.468,116.475 U2.4
  Top Layer w0.381: 68.66,117.428 70.675,119.444 84.5,119.444 U2.4@87.468,116.475
SCK: STM32.39 U2.12 | length 25.2
  Top Layer w0.254: STM32.39 69.614,104.477 ccw(c67.818,106.273) 70.358,106.273 70.358,112.903
  Top Layer w0.381: 70.358,112.903 70.866,113.411 74.527,113.411 75.819,114.703 75.819,117.094 74.438,118.475 U2.12
SCL1: C19.3 R4.2 STM32.45 | length 43.3
  Top Layer w0.254: STM32.45 66.33,105.436 ccw(c64.578,107.188) v1(67.056,107.188)
  Top Layer w0.381: C19.3 R4.2 53.34,80.137 v1(55.372,82.169)
  Bottom Layer w0.381: v1(55.372,82.169) 55.372,93.853 67.056,105.537 v1(67.056,107.188)
SDA1: C19.4 STM32.46 | length 56.6
  Top Layer w0.254: STM32.46@64.03,103.869 STM32.46 65.296,105.109 ccw(c63.5,106.905) 66.04,106.905 v1(66.04,107.823)
  Bottom Layer w0.254: C19.4 C19.4@53.848,77.089
  Bottom Layer w0.381: C19.4@53.848,77.089 61.468,77.089 62.23,77.851 62.23,80.264 61.341,81.153 54.737,81.153 53.467,82.423 53.467,93.218 66.04,105.791 v1(66.04,107.823)
SMA: C15.1 | length 7.8
  Top Layer w0.508: C15.1@94.843,116.814 cw(c94.869,116.814) C15.1
  Top Layer w0.762: v3(94.843,109.093) C15.1@94.843,116.814
UART2_RX: J2.5 STM32.13 | length 84.1
  Top Layer w0.254: v1(55.118,98.475) STM32.13
  Top Layer w0.381: v1(88.392,103.251) J2.5
  Bottom Layer w0.381: v1(55.118,98.475) 55.118,97.409 53.34,95.631 52.324,95.631 51.689,96.266 51.689,109.22 54.737,112.268 69.596,112.268 80.01,122.682 84.709,122.682 86.868,120.523 86.868,104.775 v1(88.392,103.251)
UART2_TX: J2.2 STM32.12 | length 40.7
  Top Layer w0.254: STM32.12 59.248,98.661 ccw(c61.044,100.457) 61.044,97.917 64.971,97.917 ccw(c64.971,98.351) 65.278,98.044 66.328,99.094 cw(c68.089,97.333) 68.089,99.824 v1(78.994,99.824)
  Top Layer w0.381: v1(87.63,101.981) 93.599,101.981 J2.2
  Bottom Layer w0.381: v1(78.994,99.824) 81.151,101.981 v1(87.63,101.981)
Vin: 1.2 IC3.2 J1.COM | length 73
  Top Layer w1.524: 1.2 31.196,81.326 29.337,83.185 29.337,91.24 33.518,95.421 IC3.2
  Bottom Layer w1.524: v2(33.528,95.504) 35.56,97.536 35.56,108.585 34.036,110.109 31.496,110.109 29.337,112.268 29.337,117.983 33.786,122.432 39.747,122.432 42.164,120.015 51.308,120.015 52.832,121.539 J1.COM
pads on no net: J1.2 J1.M1 J1.M2 Power2.4 STM32.3 STM32.4 STM32.10 STM32.16 STM32.17 STM32.21 STM32.22 STM32.26 STM32.28 STM32.32 STM32.33 STM32.43 TLV1.4 U2.7 U2.8 U2.10 U2.11
copper on no net: | length 108.4
  Top Layer w0.254: 21.597,75.186 22.098,73.66 ; 21.812,125.501 22.327,127.023 ; 21.844,73.661 22.352,73.659 ; 22.073,127.024 22.581,127.022 ; 22.178,92.318 22.098,73.66 ; 22.247,108.365 22.327,127.023 ; 22.613,75.182 22.098,73.66 ; 22.828,125.497 22.327,127.023 ; 26.67,129.667 26.67,130.175 ; 28.194,129.413 26.67,129.921 ; 28.194,130.429 26.67,129.921 ; 54.778,129.921 26.67,129.921 ; 70.825,129.921 98.933,129.921 ; 97.409,129.413 98.933,129.921 ; 97.409,130.429 98.933,129.921 ; 98.933,129.667 98.933,130.175

## Polygon pours and split planes (outlines as drawn)
GND on Top Layer "Top Layer-GND" (solid, pour order 10): 43.18,73.915 43.053,73.788 43.054,73.787 96.469,73.787 96.596,73.914 97.409,73.914 97.917,74.422 98.044,74.422 98.298,74.676 98.298,74.93 98.425,75.057 98.425,75.565 98.679,75.819 98.679,76.073 98.933,76.327 98.933,124.475 98.679,124.729 98.679,125.603 98.425,125.857 98.298,125.857 98.298,126.111 97.917,126.492 97.282,126.492 96.647,127.127 95.758,127.127 95.655,127.024 43.18,127.024
no net on Top Layer "Top Layer-No Net" (solid, pour order 6): 26.733,100.563
GND on Top Layer "Top Layer-GND 1" (solid, remove dead copper, pour order 4): 41.529,126.873 42.217,127.561 42.672,127.106 42.672,73.787 29.21,73.787 28.829,74.168 27.94,74.168 27.051,75.057 27.051,75.565 26.67,75.946 26.67,76.921 26.67,123.444 26.67,121.539 26.543,121.412 26.67,121.285 26.67,119.126 26.672,125.859 27.813,127 28.829,127 28.956,127.127 42.442,127.127 42.672,126.897 42.672,126.819
no net on Top Layer "Top Layer-No Net 1" (solid, pour order 2): 26.67,110.744 26.797,110.871 41.402,110.871
GND on Bottom Layer "Bottom Layer-GND" (solid, pour order 14): 43.18,127 43.18,73.787 96.52,73.787 96.774,74.041 97.409,74.041 97.663,74.295 97.79,74.295 98.171,74.676 98.171,74.803 98.679,75.311 98.679,75.438 98.806,75.565 98.806,75.819 99.06,76.073 99.06,76.475 98.933,76.602 98.933,124.841 98.806,124.968 98.806,125.222 98.552,125.476 98.552,125.73 97.917,126.365 97.79,126.365 97.663,126.492 97.282,126.492 96.774,127 96.139,127 96.012,127.127 94.361,127.127 94.234,127
GND on Bottom Layer "Bottom Layer-GND 1" (solid, remove dead copper, pour order 12): 26.67,124.206 26.67,124.968 27.178,125.476 27.178,125.984 28.321,127.127 42.545,127.127 42.672,127 42.672,73.787 29.607,73.787 29.48,73.914 28.702,73.914 28.448,74.168 28.067,74.168 27.051,75.184 27.051,75.361 26.797,75.615 26.797,76.2 26.67,76.327 26.67,124.968 27.178,125.476

## Keep-outs
Keep-Out Layer:
  lines w0.254: 26.67,76.822 26.67,124.206 ; 26.67,123.953 cw(c29.705,123.965) 29.694,127 ; 26.672,76.923 ccw(c29.705,76.822) 29.605,73.789 96.118,73.787 ccw(c96.118,76.602) 98.933,76.602 98.933,124.206 ccw(c96.139,124.206) 96.139,127 29.705,127 ; 29.718,73.787 29.718,73.787

## Other copper
Top Layer:
  text "72.263 (mm)" at 55.032,129.007 h1.52
  text "53.363 (mm)" at 23.093,92.568 h1.52 r89.75

## Silkscreen, mask and mechanical layers (free items; w line width, h text height)
Top Overlay:
  drawing of 11882 lines, arcs and shapes, not listed
  text "on" at 49.403,125.73 h1
  text "SCK" at 69.723,118.237 h0.5
  text "MISO" at 69.469,116.205 h0.5
  text "MOSI" at 69.469,114.173 h0.5
  text "+" at 86.233,114.173 h0.5
  text "NSS" at 69.723,112.268 h0.5
  text "GND" at 89.04,105.532 h0.6
  text "5V" at 96.52,105.41 h0.6
  text "@Dinh Gioi" at 51.435,105.103 h2.8 r270
  text "RX" at 89.535,102.921 h0.6
  text "TX" at 96.52,102.88 h0.6
  text "GND" at 91.543,98.552 h0.6
  text "3V3" at 94.107,98.552 h0.6
  text "+" at 97.536,95.783 h0.6
  text "3V3" at 80.772,74.231 h0.6
  text "DIO" at 83.439,74.231 h0.6
  text "CLK" at 85.979,74.231 h0.6
  text "GND" at 88.519,74.231 h0.6
  text "+" at 45.212,74.041 h1
  text "Vin" at 58.395,74.041 h1
  text "B" at 64.262,74.041 h1
  text "A" at 69.482,74.041 h1
  text "GND" at 73.66,74.041 h1
Bottom Overlay:
  lines w0.2: 27.11,76.136 cw(c29.718,76.835) 27.11,77.534 ; 27.11,123.253 cw(c29.718,123.952) 27.11,124.651 ; 27.38,75.485 ccw(c29.718,76.835) 28.368,74.497 ; 27.38,78.185 cw(c29.718,76.835) 28.368,79.173 ; 27.38,122.602 ccw(c29.718,123.952) 28.368,121.614 ; 27.38,125.302 cw(c29.718,123.952) 28.368,126.29 ; 29.019,74.227 ccw(c29.718,76.835) 30.417,74.227 ; 29.019,79.443 cw(c29.718,76.835) 30.417,79.443 ; 29.019,121.344 ccw(c29.718,123.952) 30.417,121.344 ; 29.019,126.56 cw(c29.718,123.952) 30.417,126.56 ; 31.068,74.497 ccw(c29.718,76.835) 32.056,75.485 ; 31.068,79.173 cw(c29.718,76.835) 32.056,78.185 ; 31.068,121.614 ccw(c29.718,123.952) 32.056,122.602 ; 31.068,126.29 cw(c29.718,123.952) 32.056,125.302 ; 32.326,76.136 ccw(c29.718,76.835) 32.326,77.534 ; 32.326,123.253 ccw(c29.718,123.952) 32.326,124.651 ; 93.404,76.011 cw(c96.012,76.71) 93.404,77.409 ; 93.404,123.253 cw(c96.012,123.952) 93.404,124.651 ; 93.674,75.36 ccw(c96.012,76.71) 94.662,74.372 ; 93.674,78.06 cw(c96.012,76.71) 94.662,79.048 ; 93.674,122.602 ccw(c96.012,123.952) 94.662,121.614 ; 93.674,125.302 cw(c96.012,123.952) 94.662,126.29 ; 95.313,74.102 ccw(c96.012,76.71) 96.711,74.102 ; 95.313,79.318 cw(c96.012,76.71) 96.711,79.318 ; 95.313,121.344 ccw(c96.012,123.952) 96.711,121.344 ; 95.313,126.56 cw(c96.012,123.952) 96.711,126.56 ; 97.362,74.372 ccw(c96.012,76.71) 98.35,75.36 ; 97.362,79.048 cw(c96.012,76.71) 98.35,78.06 ; 97.362,121.614 ccw(c96.012,123.952) 98.35,122.602 ; 97.362,126.29 cw(c96.012,123.952) 98.35,125.302 ; 98.62,76.011 ccw(c96.012,76.71) 98.62,77.409 ; 98.62,123.253 ccw(c96.012,123.952) 98.62,124.651
  text "3V3" at 82.423,74.297 h0.6
  text "DIO" at 84.836,74.297 h0.6
  text "CLK" at 87.503,74.299 h0.6
  text "GND" at 90.043,74.297 h0.6